# Altium PCB 2018_Traco12V5A.PcbDoc
Units mil, origin at the board's own origin, x right, y up, seen from the top; angles counter-clockwise.
Board outline 1259.84 x 2913.39 mil, 4 copper layers (1-TOP, 2-SIGNAL, 3-GND, 4-BOT), stack 68 mil thick; 15 components, 5 nets, 26 pads, 34 vias.
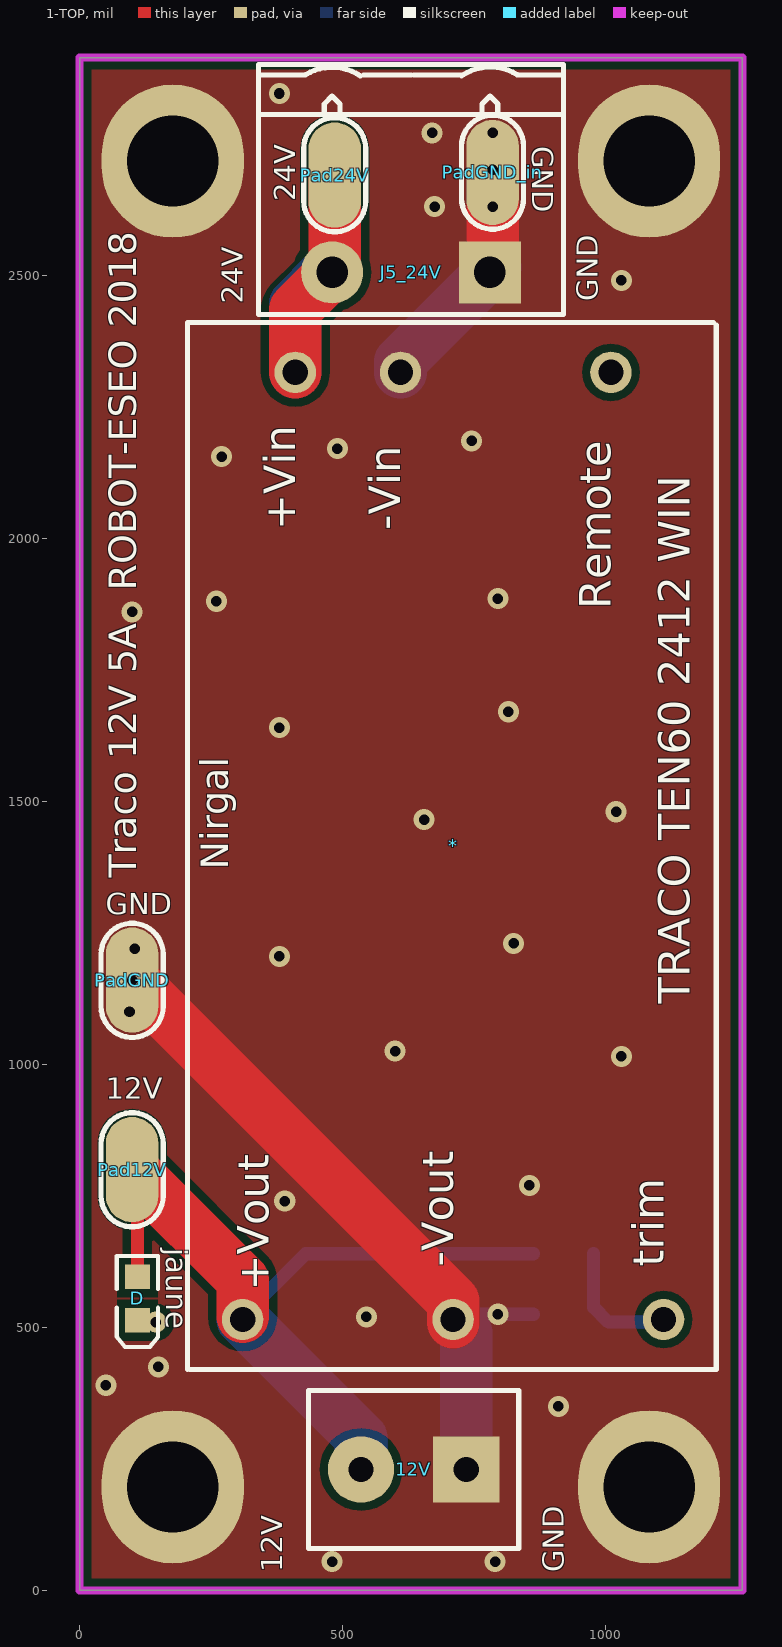
[diagram p0: 1-TOP view]
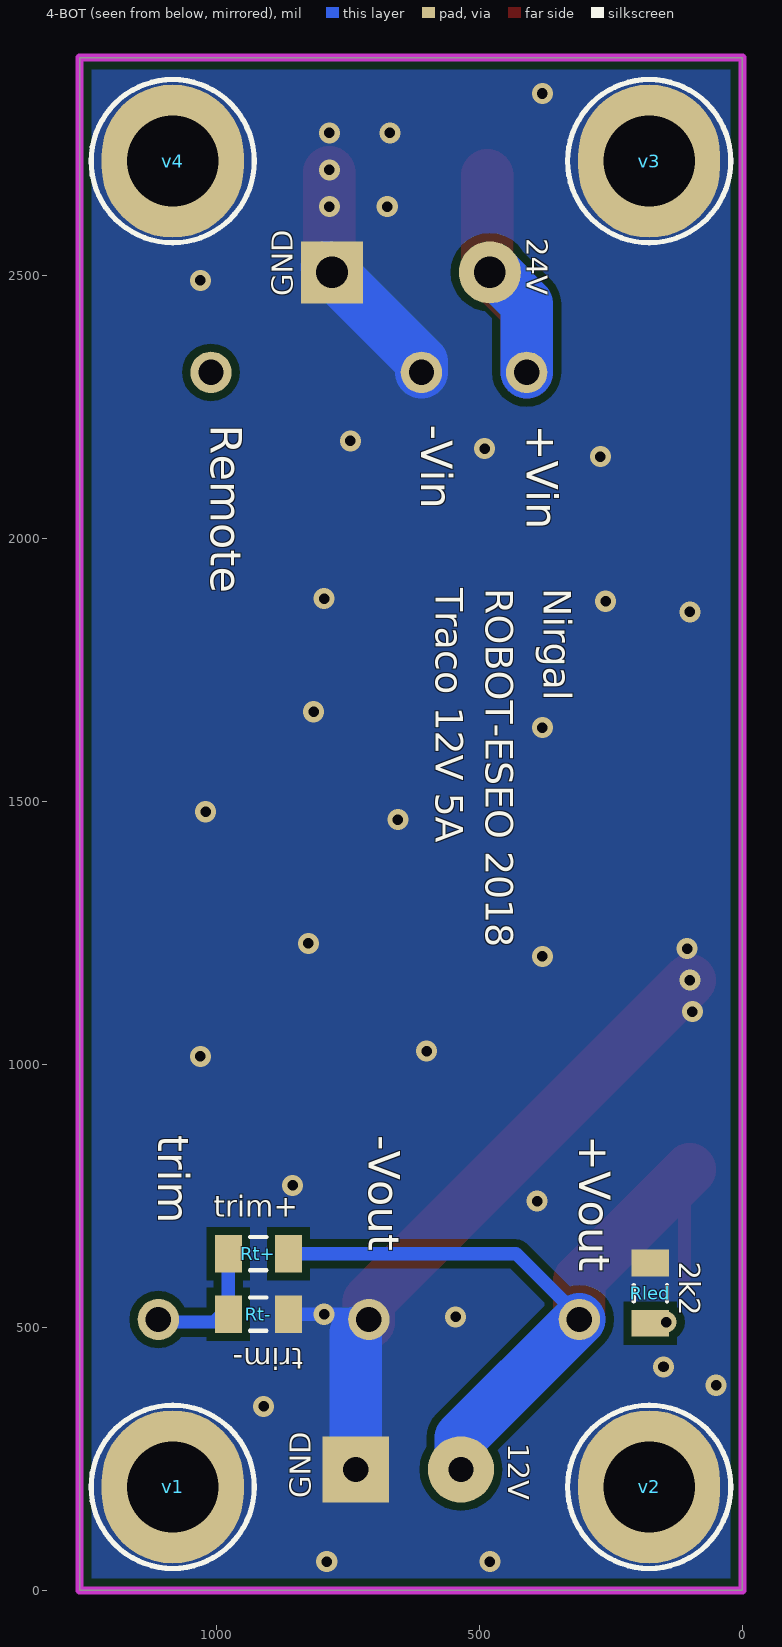
[diagram p1: 4-BOT view, seen from below]
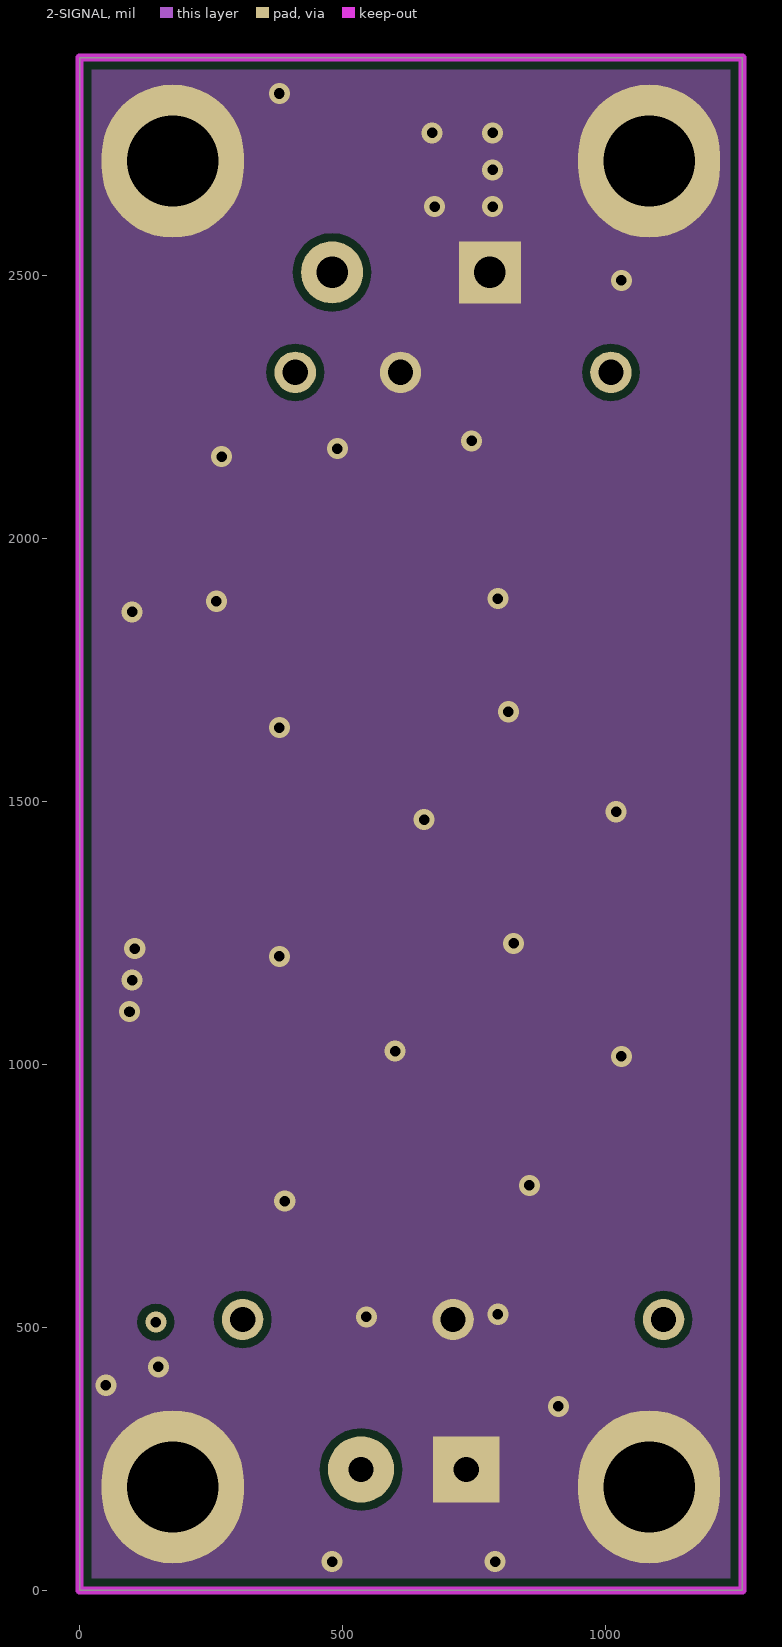
[diagram p2: 2-SIGNAL]
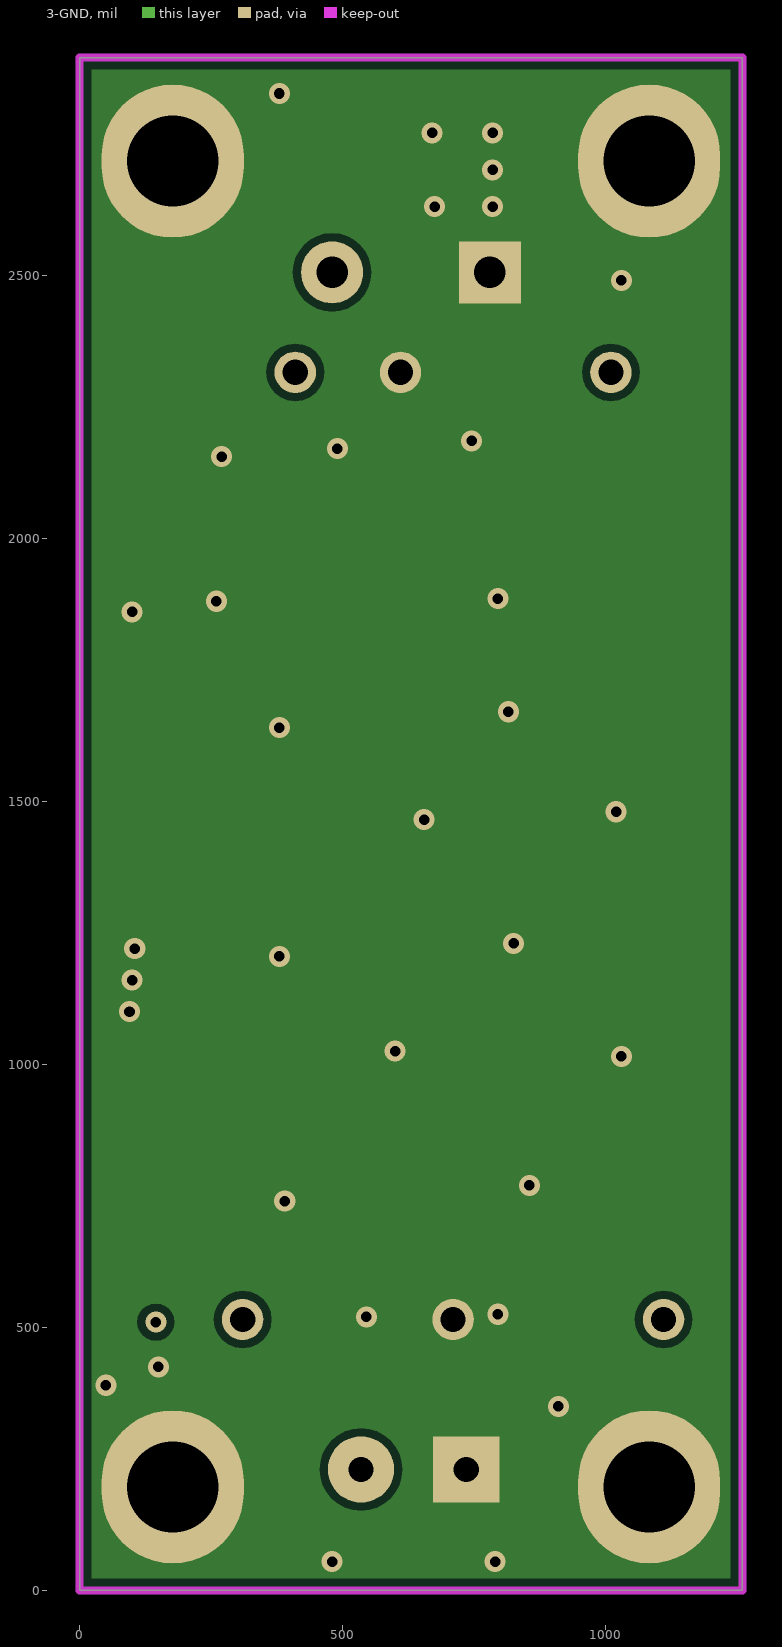
[diagram p3: 3-GND]
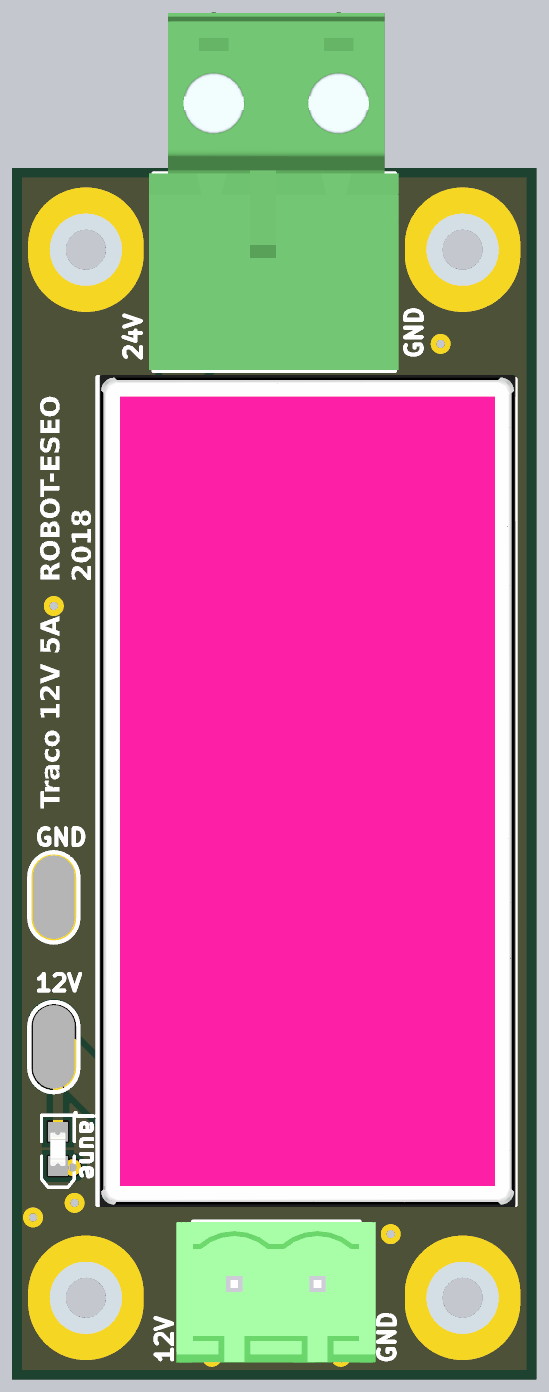
[diagram p4: 3D render of the assembled board from above, using the file's embedded part models]
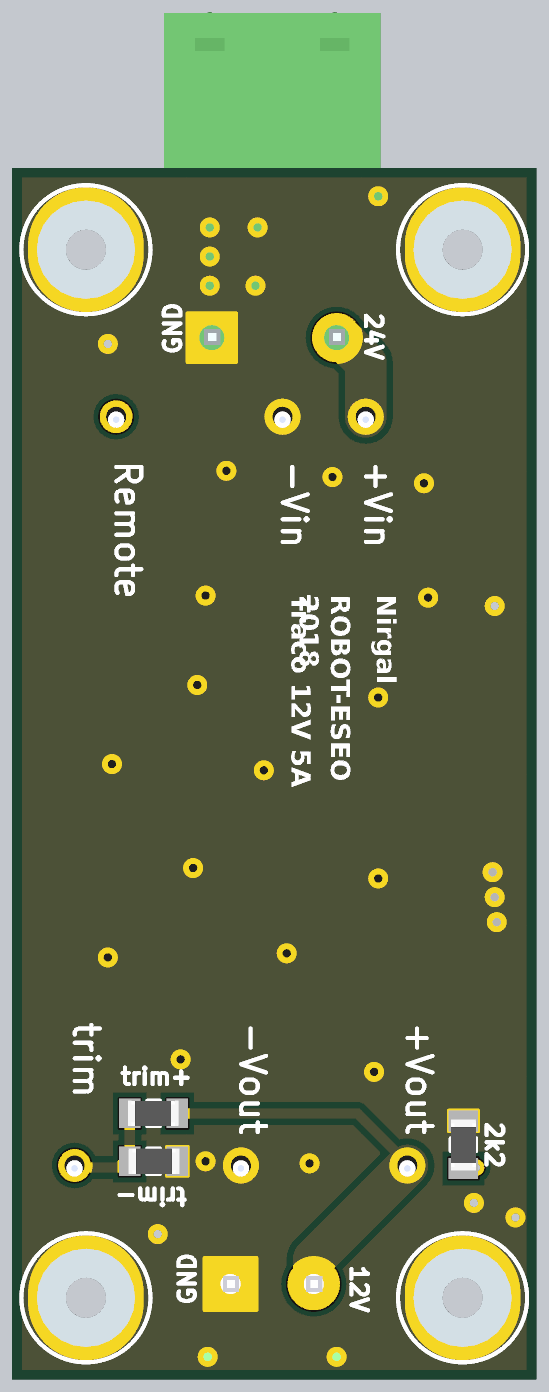
[diagram p5: 3D render of the assembled board from below, using the file's embedded part models]

## Layer stack, top to bottom
Top Solder: solder mask 0.4, Solder Resist, Dk 3.5
1-TOP: signal copper 1.4
Dielectric1: core 20.8, FR-4, Dk 4.8
2-SIGNAL: signal copper 1.4
Dielectric2: prepreg 20.8, FR-4, Dk 4.8
3-GND: signal copper 1.4
Dielectric3: core 20.8, FR-4, Dk 4.8
4-BOT: signal copper 1.4
Bottom Solder: solder mask 0.4, Solder Resist, Dk 3.5

## Board outline
0,0 1259.84,0 1259.84,2913.39 0,2913.39

## Design rules (kind name [scope] priority, off if disabled: settings)
Clearance Clearance_4 [InNamedPolygon('GND_TOP') Or  InNamedPolygon('3-GND') Or  InNamedPolygon('2-GND') Or  InNamedPolygon('4-GND')] p1: gap=15
Clearance Clearance_3 [InNamedPolygon('4-GND') Or  InNamedPolygon('GND_TOP') Or  InNamedPolygon('2-GND') Or  InNamedPolygon('3-GND')] p2: gap=10
Clearance Clearance_2 [InNamedPolygon('4-GND') Or  InNamedPolygon('2-GND') Or  InNamedPolygon('3-GND') Or  InNamedPolygon('1-GND') Or  InNamedPolygon('2-GND24')] p3: gap=10
Clearance Clearance_1 [InNamedPolygon('2-GND') Or  InNamedPolygon('3-GND') Or  InNamedPolygon('1-GND') Or  InNamedPolygon('4-GND')] p4: gap=10
Clearance [All] p5: gap=7
FabricationTestpoint [(IsPad And (OnTopLayer Or OnBottomLayer))] p1: side=3 testpointundercomponent=TRUE minsize=40 maxsize=100 preferedsize=60 minholesize=0 maxholesize=40 preferedholesize=32 testpointgrid=1 allowsidetop=TRUE allowsidebottom=TRUE usegrid=TRUE gridtolerance=0.01
HoleSize [All] p1: absolutevalues=TRUE maxlimit=200 minlimit=1 maxpercent=80.000 minpercent=20.000
PlaneConnect [All] p1: planeconnectstyle=Direct reliefexpansion=20 reliefentries=4 reliefconductorwidth=10 reliefairgap=10
PolygonConnect [All] p1: connectstyle=Direct reliefconductorwidth=10 reliefentries=4 polygonreliefangle="90 Angle" airgapwidth=10
RoomDefinition 2018_Traco12V5A [InComponentClass('2018_Traco12V5A')] p1: confinementstyle=ConfineIn formatcopy=TRUE lockcomponents=FALSE outline 3234.92,-2391.14 2704.92,-2391.14 2704.92,-1841.14 3234.92,-1841.14
RoutingVias [All] p1: holewidth=28 width=50 viastyle="Through Hole" minholewidth=28 minwidth=50 maxholewidth=28 maxwidth=50
SilkToSolderMaskClearance SilkscreenOverComponentPads [IsPad] p1: minsilkscreentomaskgap=10 clearancetoexposedcopper=TRUE
SolderMaskExpansion [All] p1: expansion=4
Width [All] p1: maxlimit=200 minlimit=10 preferedwidth=15
25 further rules are at their usual default settings.

## Components (designator, comment, footprint, x,y, rotation, side; value= is the part's Value field where it differs from the comment)
12V "BORNIER2" BORNIER2 535,230 r0 top locked
* "TRACO_12V_5A_TEN 60-2412WIN" TRACO_TEN60 710,1415 r90 top locked
D "LED jaune" LED_0805 110,555 r270 top
J5_24V "0 - 24V" BORNIER2_FEM_COUDE 780,2505 r180 top locked
Pad12V "Pad_CMS" PAD_CMS_5.08x2.54 100,800 r270 top
Pad24V "Pad_CMS" PAD_CMS_5.08x2.54 485,2690 r90 top
PadGND "Pad_CMS" PAD_CMS_5.08x2.54 100,1160 r270 top
PadGND_in "Pad_CMS" PAD_CMS_5.08x2.54 785,2695 r90 top
Rled "2,2k" R1206_N 175,565 r270 bottom
Rt+ "-" R1206_N 920,640 r0 bottom
Rt- "-" R1206_N 920,525 r180 bottom
v1 "Pad_M3" ENTRETOISE_CMS 1082.68,196.85 r180 bottom
v2 "Pad_M3" ENTRETOISE_CMS 177.17,196.85 r180 bottom
v3 "Pad_M3" ENTRETOISE_CMS 177.17,2716.54 r180 bottom
v4 "Pad_M3" ENTRETOISE_CMS 1082.68,2716.54 r180 bottom

## Footprints (in the part's own frame and the unit in brackets; to place one, negate y for a bottom-side part, rotate by r counter-clockwise, add the part's x,y. Pads: shape width x height; smd on the part's side, far side on the other; paste and mask are expansions set on the pad)
BORNIER2 [mm] "Connector; Header; 2 Position; screw terminal blocks, Pin Spacing=5.08mm"
  rect 3.2x3.2 hole 1.219: 1(5.08,0)
  round 3.2 hole 1.219: 2(0,0)
  silkscreen extent -2.54,-3.81 7.62,3.81, body extent -3.57,-4.8 8.59,3.8, height 12
BORNIER2_FEM_COUDE [mm] "Connector; Header; 2 Position; Right Angle; Female; Pin Spacing=5.08mm Green"
  rect 3x3 hole 1.524: 1(0,0)
  round 3 hole 1.524: 2(7.62,0)
  silkscreen extent -3.56,-10.03 11.18,2.03, body extent -3.78,-19.88 11.46,1.96, height 15.2
ENTRETOISE_CMS [mm] "Entretoise CMS Wurth trou 4.4mm"
  oval 6.858x7.4 hole 4.4: 1(0,0)
  silkscreen extent -3.94,-3.94 3.94,3.94, body extent -2.99,-3 2.99,2.98, height 3
LED_0805 [mm] "SM LED; 2 Flat Leads"
  rect 1.2x1.2 smd: 1(-1.05,0) 2(1.05,0)
  silkscreen extent -2.05,-1 2.35,1, body extent -1.05,-0.64 1.06,0.64, height 1.2
PAD_CMS_5.08x2.54 [mil] "Pad pour souder un fil"
  oval 200x100 smd paste+0.2: 1(0,0)
  silkscreen extent -108,-59 109,59, body extent -85,-30 84,30, height 10
R1206_N [mm] "Chip Resistor, Body 3.2x1.6mm, IPC Medium Density"
  rect 1.3x1.8 smd: 1(-1.45,0) 2(1.45,0)
  silkscreen extent -0.4,-0.8 0.4,0.8, body extent -1.68,-0.87 1.68,0.87, height 0.71
TRACO_TEN60 [mm] "Single TRACO-POWER module TEN60"
  round 2 hole 1.219: 1(22.86,7.62) 2(22.86,2.54) 3(22.86,-7.62) 4(-22.86,10.16) 5(-22.86,0) 6(-22.86,-10.16)
  silkscreen extent -25.27,-12.7 25.27,12.83, body extent -25.4,-12.7 25.4,12.7, height 10.2

## Part data
12V: "Terminal blocks, 2 pins, pitch=5mm"
D: library part LED, "Typical LED"
J5_24V: library part BORNIER2, "Terminal blocks, 2 pins, pitch=5mm"
Pad12V Pad24V PadGND PadGND_in: "Pad pour souder un fil"
Rled Rt+ Rt-: library part Resistor, "Resistor"
v1 v2 v3 v4: library part "Vis M3 X 6mm _TORX_Tête 6mm", "Vis M3 X 6mm _TORX_Tête 6mm"

## Via types
v1: diameter 40, hole 20, 1-TOP to 4-BOT, 34 vias

## Nets (pads, with @x,y where several pads share a name; then routed paths per layer and width w, separated by ;. In a path a pad name is that pad's centre, name@x,y a point inside that pad or via, vN(x,y) a via of type N, cw(c..) or ccw(c..) an arc to the next point about the centre after c; other vN are vias at no path point)
12V: 12V.2 *.4 D.1 Pad12V.1 Rt+.1 | length 1517.3
  1-TOP w25: D.1 Pad12V.1@110,790
  1-TOP w100: Pad12V.1 110,790 310,590 *.4@310,520
  4-BOT w25: *.4@320,530 430,640 Rt+.1
  4-BOT w100: *.4 535,290 12V.2@535,240
24V: *.1 J5_24V.2 Pad24V.1 | length 618.8
  1-TOP w100: *.1 410,2435 J5_24V.2 ; J5_24V.2@485,2505 Pad24V.1
  4-BOT w100: *.1 410,2445 J5_24V.2@470,2505
GND: 12V.1 *.2 *.5 J5_24V.1 PadGND.1 PadGND_in.1 Rled.1 Rt-.2 v1.1 v2.1 v3.1 v4.1 | length 1776.4
  1-TOP w100: v1(100,1160) 710,550 *.5 *.5@710,510 ; J5_24V.1@785,2515 PadGND_in.1
  4-BOT w25: *.5@710,510 725,525 Rt-.2
  4-BOT w100: *.2 610,2335 J5_24V.1 J5_24V.1@790,2515 ; 12V.1 *.5@735,490
  other v1: 480,55 790,55 910,350 50,390 150,425 545,520 795,525 390,740 855,770 1030,1015 600,1025 95,1100 380,1205 105,1220 825,1230 655,1465 1020,1480 380,1640 815,1670 100,1860 260,1880 795,1885 270,2155 490,2170 745,2185 1030,2490 675,2630 785,2630 785,2700 670,2770 785,2770 380,2845
Net*_6: *.6 Rt+.2 Rt-.1 | length 261.6
  4-BOT w25: Rt+.2 977.09,537.91 1005,510 *.6@1125,510
NetD_2: D.2 Rled.2
  other v1: 145,510
pads on no net: *.3

## Polygon pours and split planes (outlines as drawn)
GND on 1-TOP "GND_TOP" (solid, pour order 11): 5,2910 1260,2910 1260,5 5,5
GND on 2-SIGNAL "2-GND" (solid, pour order 10): 5,2910 1255,2910 1255,0 5,0
GND on 3-GND "3-GND" (solid, pour order 9): 0,2910 1260,2910 1260,10 0,10
GND on 4-BOT "4-GND" (solid, pour order 8): 0,2910 1260,2910 1260,5 0,5

## Keep-outs
Keep-Out Layer:
  the board outline again, w15

## Silkscreen, mask and mechanical layers (free items; w line width, h text height)
Top Overlay:
  text "GND" at 860,2745 h40 r270
  text "24V" at 410,2640 h40 r90
  text "GND" at 985,2450 h40 r90
  text "24V" at 310,2445 h40 r90
  text "ROBOT-ESEO 2018" at 125,1900 h90 r90
  text "Nirgal" at 300,1370 h90 r90
  text "Traco 12V 5A" at 125,1355 h90 r90
  text "GND" at 50,1285 h40
  text "12V" at 50,935 h40
  text "jaune" at 165,650 h40 r270
  text "12V" at 385,35 h40 r90
  text "GND" at 920,35 h40 r90
Bottom Overlay:
  text "24V" at 410,2570 h40 r90
  text "GND" at 855,2460 h40 r270
  text "Nirgal" at 395,1905 h90 r90
  text "ROBOT-ESEO 2018" at 505,1905 h90 r90
  text "Traco 12V 5A" at 600,1905 h90 r90
  text "trim+" at 1005,710 h40
  text "2k2" at 120,625 h40 r90
  text "trim-" at 835,460 h40 r180
  text "12V" at 445,280 h40 r90
  text "GND" at 820,175 h40 r270

## Text inside footprints (layer, text, board x,y; h text height)
*: Top Overlay "+Vin" at 410,2015 h60 r90; Top Overlay "-Vin" at 610,2015 h60 r90; Top Overlay "Remote" at 1010,1865 h60 r90; Top Overlay "+Vout" at 360,570 h60 r90; Top Overlay "-Vout" at 710,615 h60 r90; Top Overlay "trim" at 1110,615 h60 r90; Top Overlay "TRACO TEN60 2412 WIN" at 1160,1115 h60 r90; Bottom Overlay "Remote" at 1010,2215 h60 r90; Bottom Overlay "-Vin" at 610,2215 h60 r90; Bottom Overlay "+Vin" at 410,2215 h60 r90; Bottom Overlay "trim" at 1110,865 h60 r90; Bottom Overlay "-Vout" at 710,865 h60 r90; Bottom Overlay "+Vout" at 310,865 h60 r90